# EAGLE board Schematic_v23 (EAGLE 9.7.0)
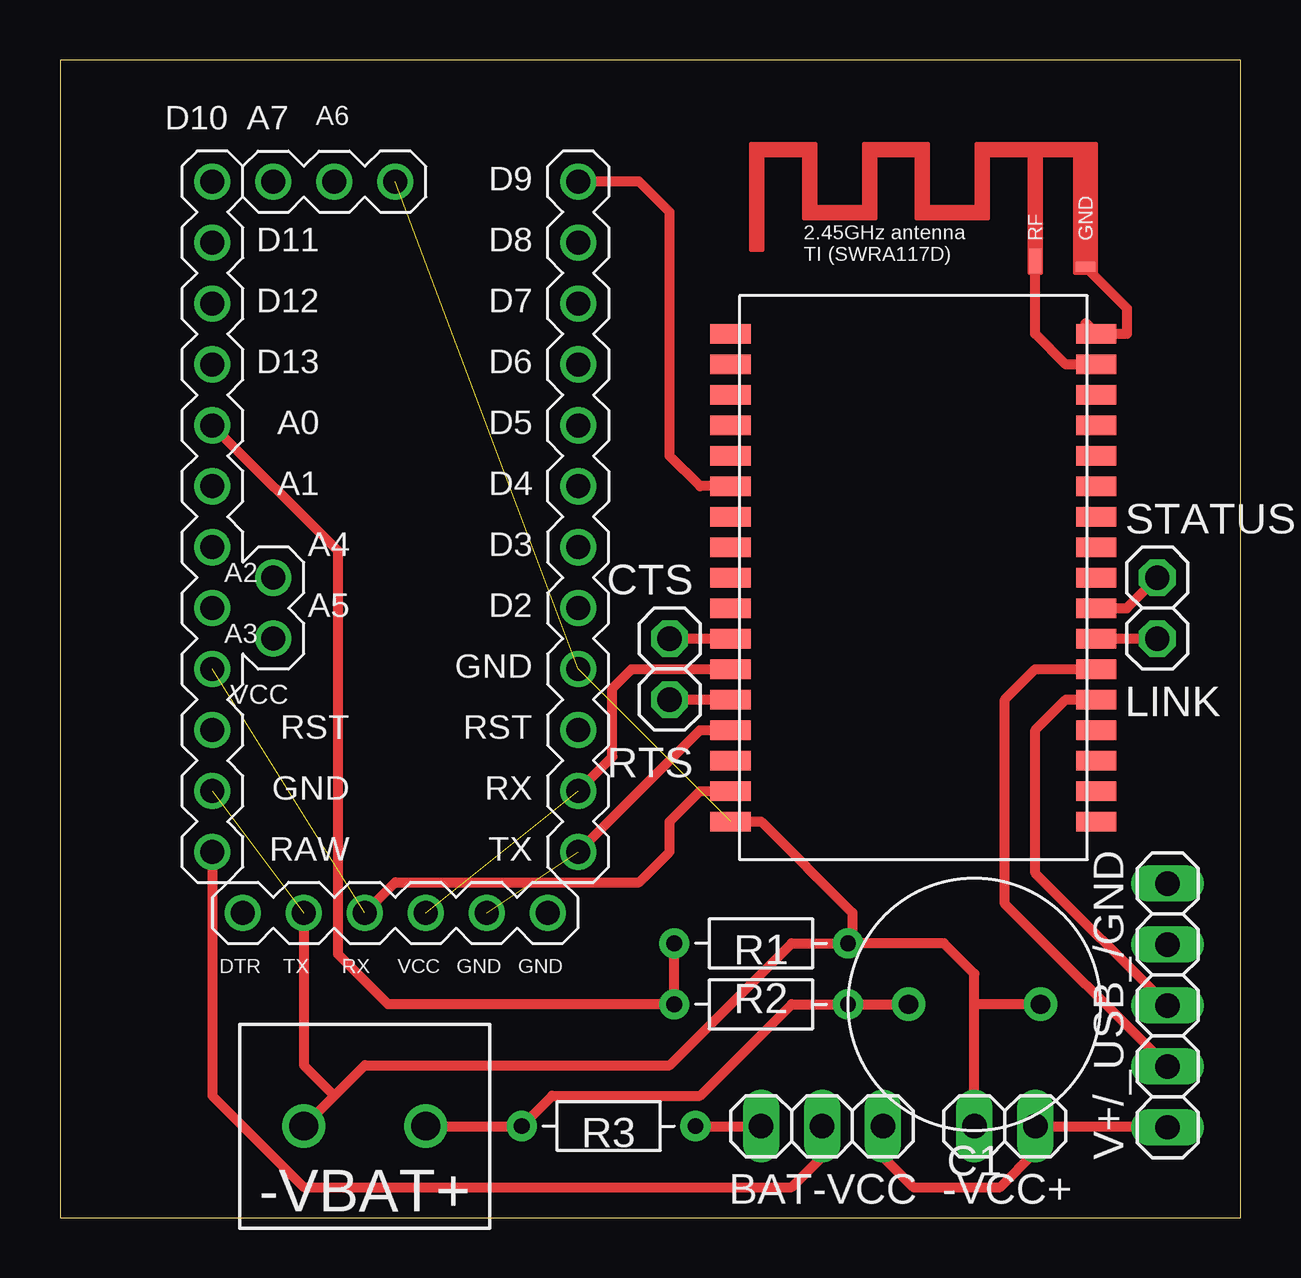
[diagram p0: board, top side]
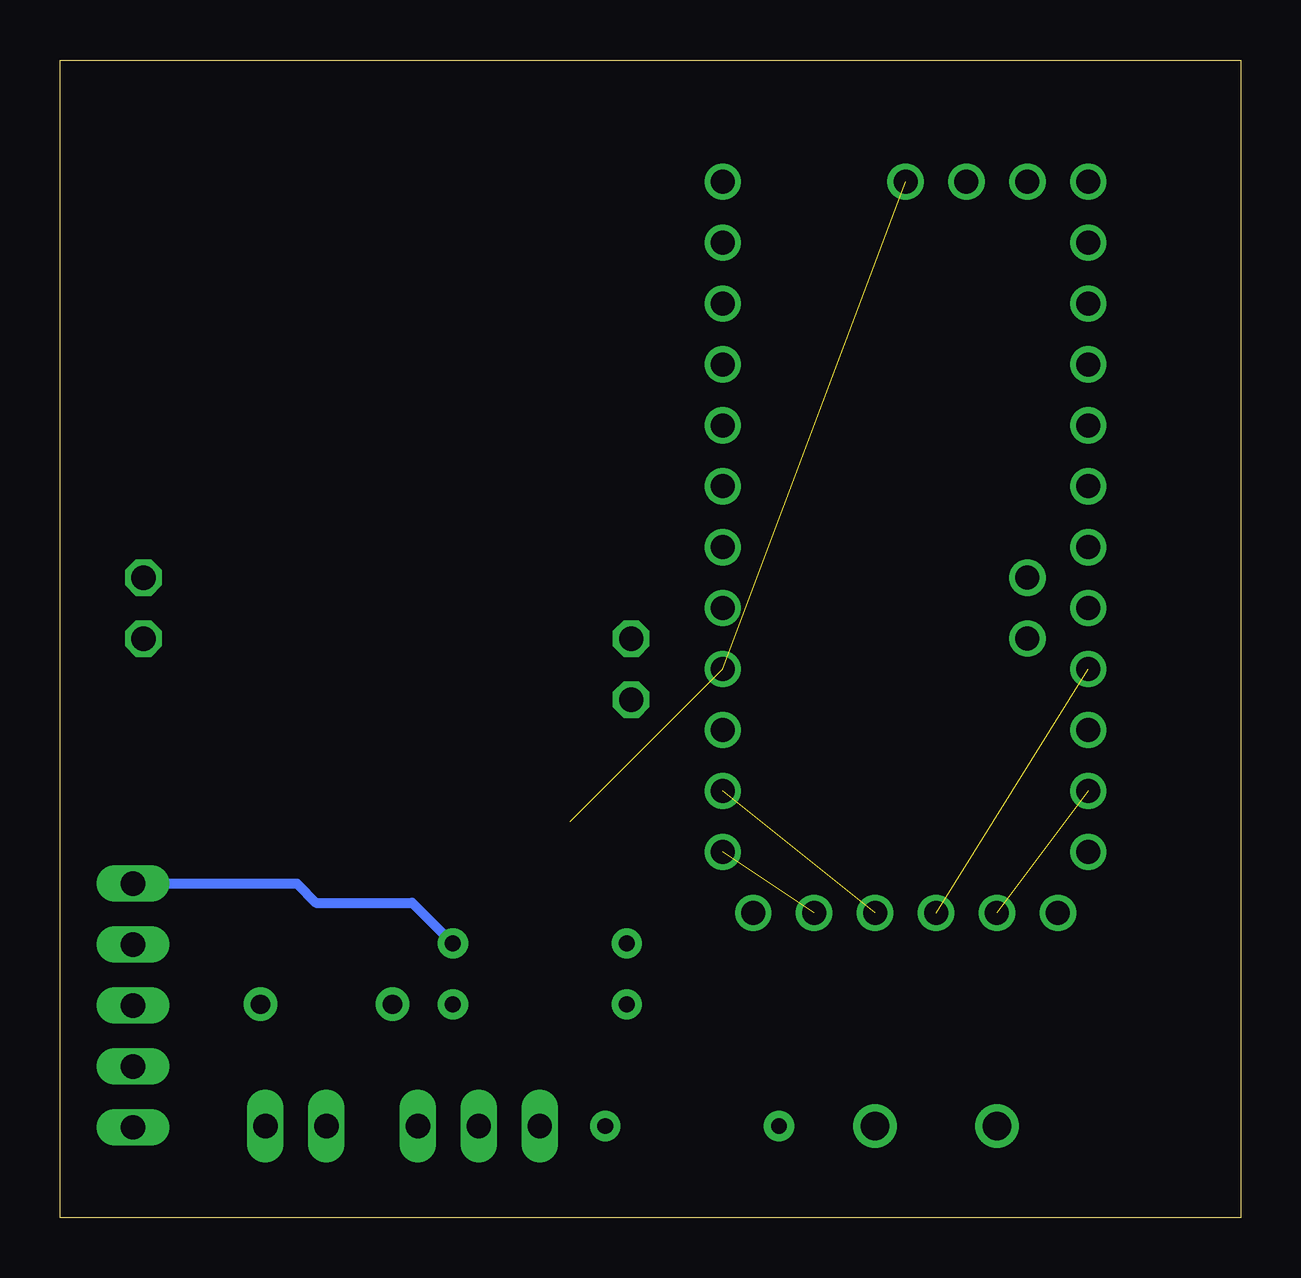
[diagram p1: board, bottom side, seen from below]

Size 49.2 x 48.25 mm. Coordinates in mm from the lower left corner, seen from the top.
Outline: 0,0 49.2,0 49.2,48.25 0,48.25 0,0
Copper layers (1*16): Top 0.035mm / dielectric 1.5mm / Bottom 0.035mm
Design rules "default": minimum track width 6mil, minimum drill 0.35mm, track to track 6mil, track to pad 6mil, pad to pad 6mil, via to via 6mil, smd to smd 6mil, copper to edge 40mil, drill to drill 6mil, minimum pad ring 10mil, minimum via ring 8mil, stop-mask expansion 4mil, vias tented up to drill 0mil, thermal gap 10mil

## Footprints (pad centres in the part's own frame; a part is rotated, then mirrored left to right if it is on the bottom)
TERMBLK_508-2N = drill 1.2: 1 0,0; 2 5.08,0
1X02 = drill 1.016 long: 1 -1.27,0; 2 1.27,0
ARDUINO_PRO_MINI = drill 1: A0 11.43,-8.89; A1 11.43,-6.35; A2 11.43,-3.81; A3 11.43,-1.27; A4 8.89,-2.54; A5 8.89,0; A6 6.35,-19.05; A7 8.89,-19.05; BLK 10.16,11.43; D2 -3.81,-1.27; D3 -3.81,-3.81; D4 -3.81,-6.35; D5 -3.81,-8.89; D6 -3.81,-11.43; D7 -3.81,-13.97; D8 -3.81,-16.51; D9 -3.81,-19.05; D10 11.43,-19.05; D11 11.43,-16.51; D12 11.43,-13.97; D13 11.43,-11.43; DTR -2.54,11.43; GND -3.81,1.27; GND@1 11.43,6.35; GND@2 7.62,11.43; GND@3 3.81,-19.05; RAW 11.43,8.89; RST 11.43,3.81; RST@1 -3.81,3.81; RX -3.81,6.35; RX@1 2.54,11.43; TX -3.81,8.89; TX@1 0,11.43; VCC 11.43,1.27; VCC@1 5.08,11.43
1X03 = drill 1.016 long: 1 -2.54,0; 2 0,0; 3 2.54,0
CAPRD550W60D1025H1250B = drill 0.8 pad 1.4: 1 -2.75,0; 2 2.75,0
1X01 = drill 1.016 octagon: 1 0,0
RESAD724W46L381D178B = drill 0.66 pad 1.26: 1 -3.62,0; 2 3.62,0
BTM-112 = smd 1.676 x 0.813: P$1 -7.62,10.16; P$2 -7.62,8.89; P$3 -7.62,7.62; P$4 -7.62,6.35; P$5 -7.62,5.08; P$6 -7.62,3.81; P$7 -7.62,2.54; P$8 -7.62,1.27; P$9 -7.62,0; P$10 -7.62,-1.27; P$11 -7.62,-2.54; P$12 -7.62,-3.81; P$13 -7.62,-5.08; P$14 -7.62,-6.35; P$15 -7.62,-7.62; P$16 -7.62,-8.89; P$17 -7.62,-10.16; P$18 7.62,-10.16; P$19 7.62,-8.89; P$20 7.62,-7.62; P$21 7.62,-6.35; P$22 7.62,-5.08; P$23 7.62,-3.81; P$24 7.62,-2.54; P$25 7.62,-1.27; P$26 7.62,0; P$27 7.62,1.27; P$28 7.62,2.54; P$29 7.62,3.81; P$30 7.62,5.08; P$31 7.62,6.35; P$32 7.62,7.62; P$33 7.62,8.89; P$34 7.62,10.16
SWRA117D_RIGHT = smd 0.813 x 0.406: GND -0.45,0.25 | smd 0.508 x 1.016: RF -2.55,0.5
1X05 = drill 1.016 long: 1 -5.08,0; 2 -2.54,0; 3 0,0; 4 2.54,0; 5 5.08,0

## Placement (x,y rotation side)
-VBAT+  2828XX-2282837-2  [TERMBLK_508-2N]  10.16,3.81 0 top
-VCC+  PINHD-1X2  [1X02]  39.37,3.81 0 top
ARDUINO1  [ARDUINO_PRO_MINI]  17.78,24.13 180 top
BAT-VCC  PINHD-1X3  [1X03]  31.75,3.81 0 top
C1  [CAPRD550W60D1025H1250B]  38.1,8.89 180 top
CTS  PINHD-1X1  [1X01]  25.4,24.13 0 top
LINK  PINHD-1X1  [1X01]  45.72,24.13 0 top
R1  330k  [RESAD724W46L381D178B]  29.21,8.89 0 top
R2  40k  [RESAD724W46L381D178B]  29.21,11.43 180 top
R3  100  [RESAD724W46L381D178B]  22.86,3.81 0 top
RTS  PINHD-1X1  [1X01]  25.4,21.59 0 top
STATUS  PINHD-1X1  [1X01]  45.72,26.67 0 top
U$1  BTM-112  [BTM-112]  35.56,26.67 0 top
U$2  ANTENNA_1RIGHT  [SWRA117D_RIGHT]  43.18,39.37 0 top
V+/_USB_/GND  PINHD-1X5  [1X05]  46.15,8.84 90 top

## Library data of the parts
-VBAT+ = Connector; CATEGORY: Connector; DESCRIPTION: 2 Position Wire to Board Terminal Block Horizontal with Board 5.08 mm Through Hole; MANUFACTURER: TE Connectivity; MPN: 282837-2; OPERATING_TEMPERATURE: -40°C to +105°C; PART_STATUS: ACTIVE; ROHS_COMPLIANCE: RoHS Compliant; SERIES: 282837; SUBCATEGORY: Terminal Block; TYPE: Side Wire Entry
-VCC+ BAT-VCC CTS LINK RTS STATUS V+/_USB_/GND = Connector; CATEGORY: CONNECTOR; SUB-CATEGORY: PIN-HEADER
ARDUINO1 = arduinopromini
C1 = Capacitor; CATEGORY: Capacitor
R1-R3 = Resistor; CATEGORY: Resistor; SUB-CATEGORY: Fixed
U$1 = BTM112
U$2 = ant-planar-1

## Nets
3V3: ARDUINO1.VCC ARDUINO1.VCC@1 U$1.P$16
+V: -VBAT+.2 C1.2 R1.2 R3.1
CTS: CTS.1 U$1.P$11
GND: -VBAT+.1 -VCC+.1 ARDUINO1.GND ARDUINO1.GND@1 ARDUINO1.GND@2 ARDUINO1.GND@3 C1.1 R2.1 U$1.P$17 V+/_USB_/GND.5
GND2: U$1.P$32
N$1: U$1.P$33 U$2.RF
N$2: U$1.P$34 U$2.GND
N$4: ARDUINO1.RX ARDUINO1.RX@1 U$1.P$12
N$5: ARDUINO1.TX ARDUINO1.TX@1 U$1.P$14
N$6: ARDUINO1.RAW BAT-VCC.2
N$7: ARDUINO1.D9 U$1.P$6
N$8: BAT-VCC.1 R3.2
N$9: U$1.P$23 V+/_USB_/GND.2
N$10: U$1.P$22 V+/_USB_/GND.3
N$11: LINK.1 U$1.P$24
N$12: STATUS.1 U$1.P$25
RTS: RTS.1 U$1.P$13
VCC: -VCC+.2 BAT-VCC.3 V+/_USB_/GND.1
VMM: ARDUINO1.A0 R1.1 R2.2

## Tracks (layer width: path | path; a pad name or v marks a point on that pad's centre or on a via)
3V3  (1 unrouted)
  Top 0.406: ARDUINO1.VCC@1 13.97,13.97 24.13,13.97 25.4,15.24 25.4,16.51 26.67,17.78 U$1.P$16
+V
  Top 0.406: -VBAT+.2 R3.1 20.51,5.08 26.67,5.08 30.48,8.89 R1.2 C1.2
CTS
  Top 0.406: CTS.1 U$1.P$11
GND  (3 unrouted)
  Top 0.406: U$1.P$17 29.21,16.51 33.02,12.7 33.02,11.62 R2.1 | -VBAT+.1 11.43,5.08 | 11.43,5.08 12.7,6.35 25.4,6.35 30.48,11.43 R2.1 | -VCC+.1 38.1,8.89 | 38.1,8.89 38.1,10.16 36.83,11.43 R2.1 | C1.1 38.1,8.89 | ARDUINO1.GND@2 10.16,6.35 11.43,5.08
  Bottom 0.406: V+/_USB_/GND.5 39.33,13.92 38.54,13.12 34.52,13.12 R2.1
N$1
  Top 0.406: U$1.P$33 41.91,35.56 40.63,36.84 U$2.RF
N$2
  Top 0.406: 42.73,37.28 U$1.P$34 44.45,36.83 44.45,37.9 U$2.GND
N$4  (1 unrouted)
  Top 0.406: U$1.P$12 23.82,22.86 23.01,22.05 23.01,19.2 ARDUINO1.RX
N$5  (1 unrouted)
  Top 0.406: ARDUINO1.TX 26.67,20.32 U$1.P$14
N$6
  Top 0.406: ARDUINO1.RAW 6.35,5.08 10.16,1.27 30.48,1.27 31.75,2.54 BAT-VCC.2
N$7
  Top 0.406: U$1.P$6 26.67,30.48 25.4,31.75 25.4,41.91 24.13,43.18 ARDUINO1.D9
N$8
  Top 0.406: R3.2 BAT-VCC.1
N$9
  Top 0.406: U$1.P$23 40.64,22.86 39.37,21.59 39.37,13.08 V+/_USB_/GND.2
N$10
  Top 0.406: U$1.P$22 41.91,21.59 40.64,20.32 40.64,14.35 V+/_USB_/GND.3
N$11
  Top 0.406: U$1.P$24 LINK.1
N$12
  Top 0.406: U$1.P$25 44.45,25.4 STATUS.1
RTS
  Top 0.406: RTS.1 U$1.P$13
VCC
  Top 0.406: BAT-VCC.3 34.29,2.54 35.56,1.27 39.17,1.27 40.64,2.74 -VCC+.2 46.1,3.81 V+/_USB_/GND.1
VMM
  Top 0.406: R2.2 R1.1 13.67,8.89 11.59,10.97 11.59,27.78 ARDUINO1.A0